# Altium PCB RS485转CAN-V1.PcbDoc
Units mm, origin at the board's own origin, x right, y up, seen from the top; angles counter-clockwise.
Board outline 47.8 x 78.8 mm, 2 copper layers (Top Layer, Bottom Layer), stack 1.571 mm thick; 59 components, 52 nets, 200 pads, 155 vias.
Unrouted connection lines stored in the file: 1.
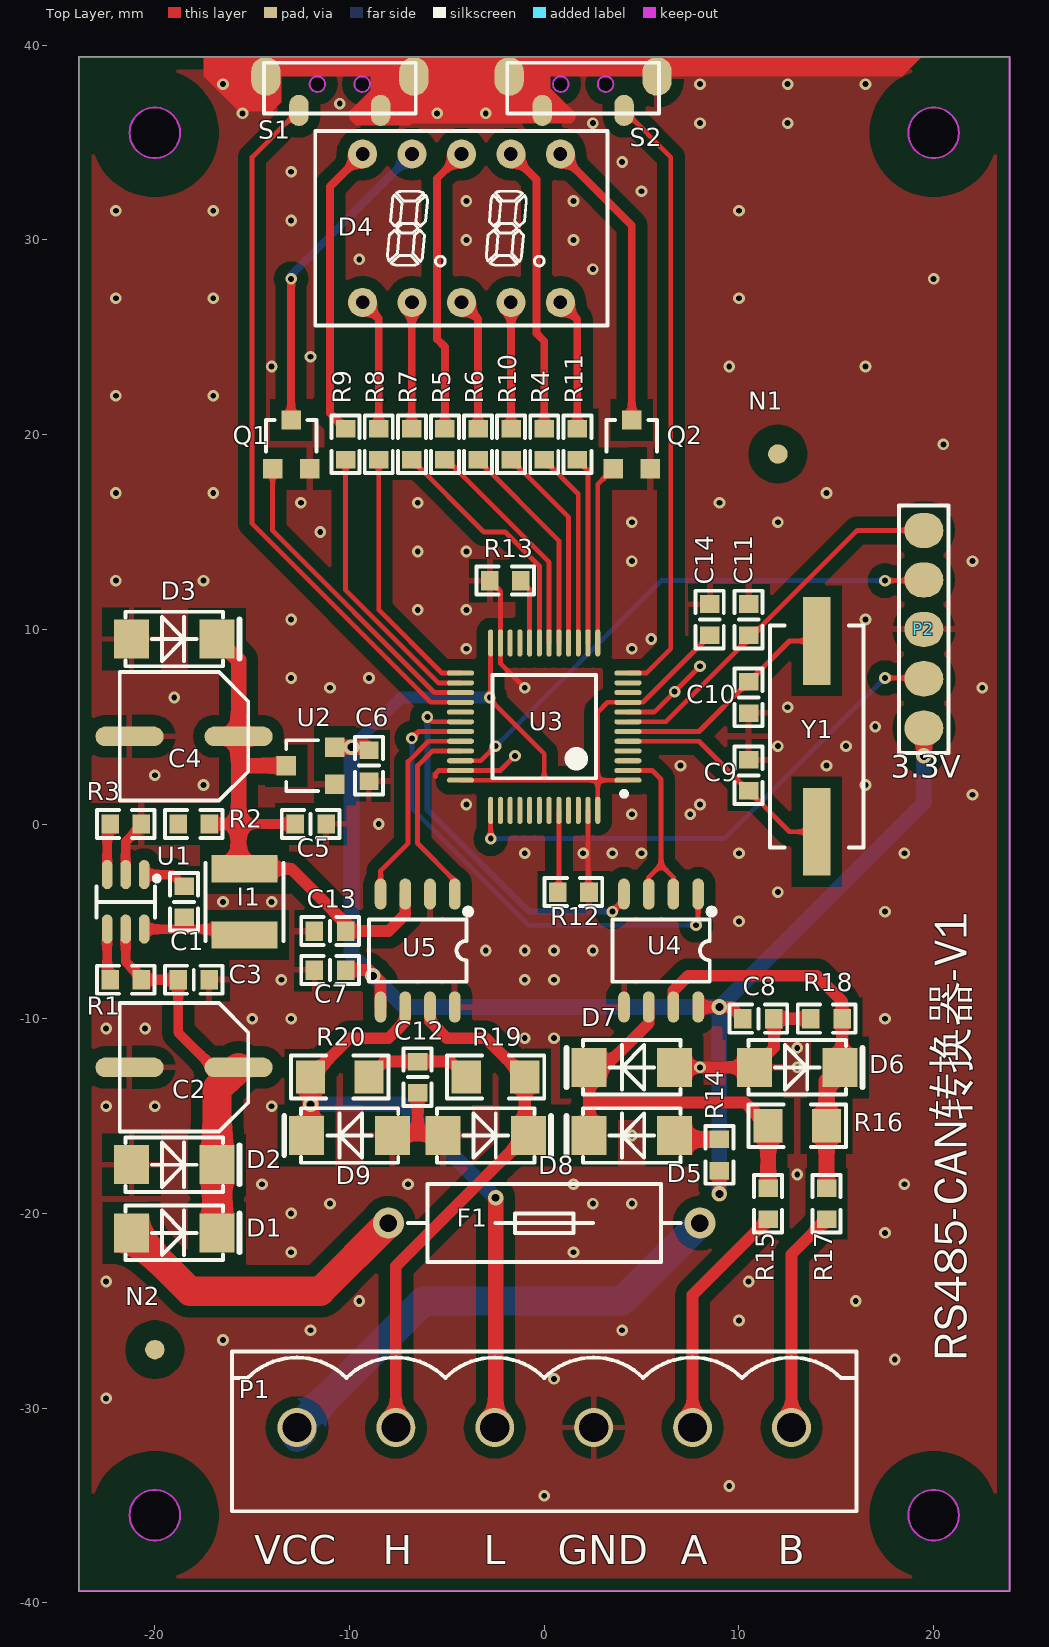
[diagram p0: Top Layer view]
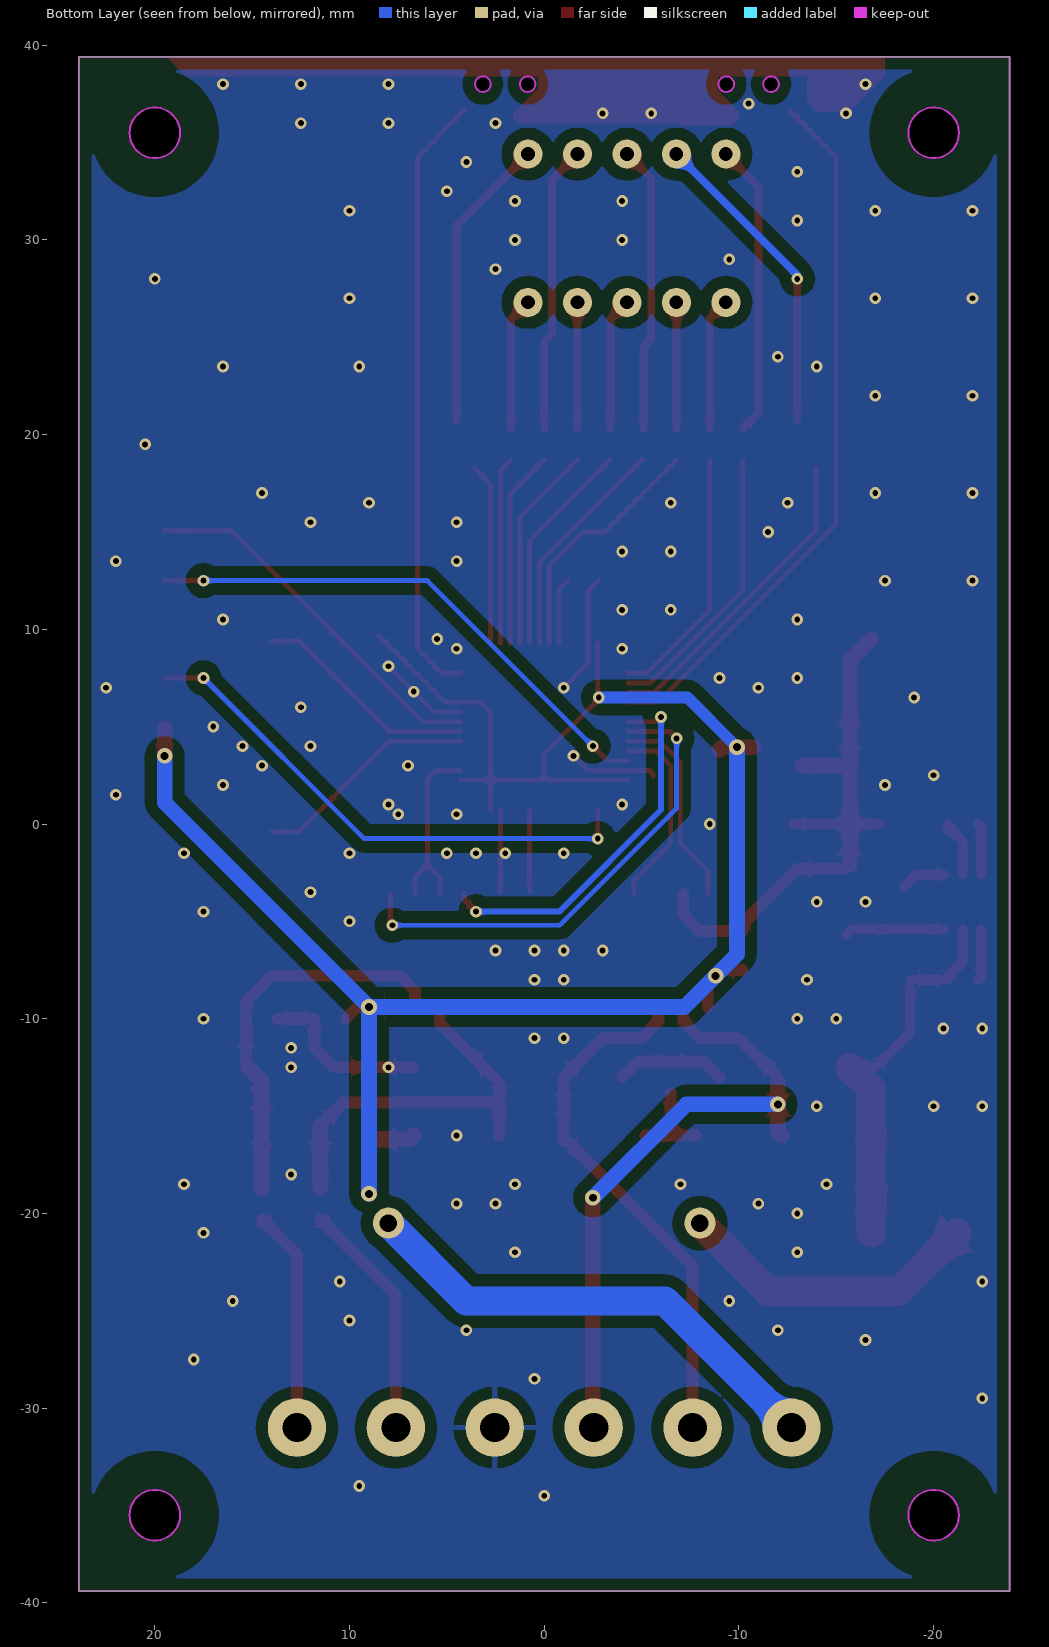
[diagram p1: Bottom Layer view, seen from below]
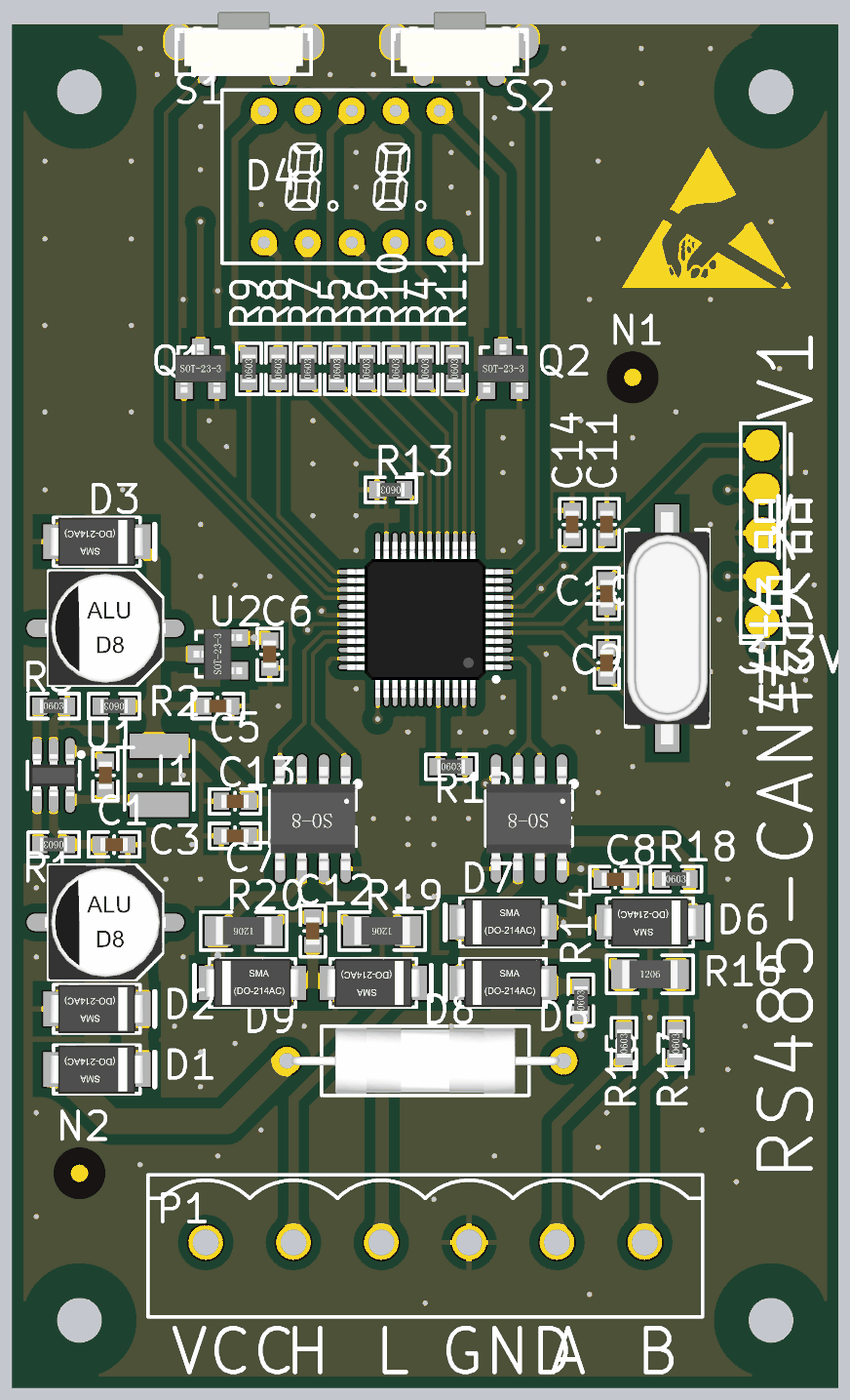
[diagram p2: 3D render of the assembled board from above, using the file's embedded part models]

## Layer stack, top to bottom
Top Solder: solder mask 0.0102, Solder Resist, Dk 3.5
Top Layer: signal copper 0.0356
Dielectric1: dielectric 1.5, FR-4, Dk 4.8
Bottom Layer: signal copper 0.0356
Bottom Solder: solder mask 0.0102, Solder Resist, Dk 3.5

## Board outline
-23.9,-39.4 -23.9,39.4 23.9,39.4 23.9,-39.4
cut-out: -20,-36.8 cw(c-20,-35.5) -21.3,-35.5 cw(c-20,-35.5) -20,-34.2 cw(c-20,-35.5) -18.7,-35.5 cw(c-20,-35.5)
cut-out: 20,-36.8 cw(c20,-35.5) 18.7,-35.5 cw(c20,-35.5) 20,-34.2 cw(c20,-35.5) 21.3,-35.5 cw(c20,-35.5)
cut-out: -20,34.2 cw(c-20,35.5) -21.3,35.5 cw(c-20,35.5) -20,36.8 cw(c-20,35.5) -18.7,35.5 cw(c-20,35.5)
cut-out: 20,34.2 cw(c20,35.5) 18.7,35.5 cw(c20,35.5) 20,36.8 cw(c20,35.5) 21.3,35.5 cw(c20,35.5)

## Design rules (kind name [scope] priority, off if disabled: settings)
Clearance Clearance敷铜间隔 [InPolygon] p1: gap=0.6
Clearance Clearance通用间隔 [All] p2: gap=0.24
PlaneConnect [All] p1: planeconnectstyle=Relief reliefexpansion=0.508 reliefentries=4 reliefconductorwidth=0.3 reliefairgap=0.3
PolygonConnect PolygonConnect_过孔 [All vs IsVia] p1: connectstyle=Direct reliefconductorwidth=0.254 reliefentries=4 polygonreliefangle="90 Angle" airgapwidth=0.254
PolygonConnect [All] p2: connectstyle=Relief reliefconductorwidth=0.3 reliefentries=4 polygonreliefangle="90 Angle" airgapwidth=0.6
RoutingVias [All] p1: holewidth=0.5 width=1 viastyle="Through Hole" minholewidth=0.4 minwidth=0.8 maxholewidth=10 maxwidth=10
SolderMaskExpansion [All] p1: expansion=0.102
Width [All] p1: maxlimit=10 minlimit=0.25 preferedwidth=0.5
29 further rules are at their usual default settings.

## Components (designator, comment, footprint, x,y, rotation, side; value= is the part's Value field where it differs from the comment)
C1 "104" C-0603 -18.5,-4 r90 top
C2 "100UF/35V" 贴片固态电容6.3*7.7 -18.5,-12.5 r180 top
C3 "104" C-0603 -18,-8 r180 top
C4 "470UF/10V" 贴片固态电容6.3*7.7 -18.5,4.5 r180 top
C5 "104" C-0603 -12,0 r180 top
C6 "106" C-0603 -9,3 r90 top
C7 "104" C-0603 -11,-7.5 r0 top
C8 "104" C-0603 11,-10 r180 top
C9 "20P" C-0603 10.5,2.5 r270 top
C10 "20P" C-0603 10.5,6.5 r90 top
C11 "104" C-0603 10.5,10.5 r270 top
C12 "472" C-0603 -6.5,-13 r90 top
C13 "104" C-0603 -11,-5.5 r0 top
C14 "104" C-0603 8.5,10.5 r270 top
D1 "M7" SMA -19,-21 r180 top
D2 "SMAJ30A" SMA -19,-17.5 r180 top
D3 "SMAJ5.0A" SMA -19,9.5 r180 top
D4 "0.28英寸2位共阴绿色" 2位0.28英寸 -4.25,30.6 r0 top
D5 "SS12" SMA 4.5,-16 r0 top
D6 "SMAJ5.0A" SMA 13,-12.5 r180 top
D7 "SMAJ5.0A" SMA 4.5,-12.5 r0 top
D8 "SMAJ5.0A" SMA -3,-16 r180 top
D9 "SMAJ5.0A" SMA -10,-16 r0 top
F1 "F0.25A" FUSE-3*10带引线 0,-20.5 r180 top
I1 "10uH" 4030 -15.4,-4 r90 top
N1 "光学定位点" MARK-1mm-3mm 12,19 r0 top
N2 "光学定位点" MARK-1mm-3mm -20,-27 r0 top
P1 "" KF2EDGVC-5.08-6P 0,-31 r0 top
P2 "ST-LINK" 5P下载口 19.5,10 r90 top
Q1 "2N7002" SOT-23 -13,19.5 r270 top
Q2 "2N7002" SOT-23 4.5,19.5 r270 top
R1 "100K" R-0603 -21.5,-8 r180 top
R2 "11K" R-0603 -18,0 r180 top
R3 "2.1K" R-0603 -21.5,0 r0 top
R4 "470" R-0603 0,19.5 r90 top
R5 "470" R-0603 -5.1,19.5 r90 top
R6 "470" R-0603 -3.4,19.5 r90 top
R7 "470" R-0603 -6.8,19.5 r90 top
R8 "470" R-0603 -8.5,19.5 r90 top
R9 "470" R-0603 -10.2,19.5 r90 top
R10 "470" R-0603 -1.7,19.5 r90 top
R11 "470" R-0603 1.7,19.5 r90 top
R12 "10K" R-0603 1.5,-3.5 r0 top
R13 "10K" R-0603 -2,12.5 r180 top
R14 "1K" R-0603 9,-17 r90 top
R15 "10" R-0603 11.5,-19.5 r90 top
R16 "1K" R-1206 13,-15.5 r0 top
R17 "10" R-0603 14.5,-19.5 r90 top
R18 "1K" R-0603 14.5,-10 r0 top
R19 "62" R-1206 -2.5,-13 r180 top
R20 "62" R-1206 -10.5,-13 r180 top
S1 "地址+/连续+" SB-3*6*3.5 -10.5,38 r180 top
S2 "地址-/设置/确定" SB-3*6*3.5 2,38 r180 top
U1 "BL9341" SOT-23-6-m -21.5,-4 r90 top
U2 "ME6206A33M3G" SOT-23 -12,3 r0 top
U3 "GD32F103C8T6" LQFP48-L 0,5 r90 top
U4 "TP8485E-SR" SOP-8-m 6,-6.5 r180 top
U5 "TJA1051T/3" SOP-8-M -6.5,-6.5 r180 top
Y1 "8M" HC-49SMD 14,4.5 r270 top

## Footprints (in the part's own frame and the unit in brackets; to place one, negate y for a bottom-side part, rotate by r counter-clockwise, add the part's x,y. Pads: shape width x height; smd on the part's side, far side on the other; paste and mask are expansions set on the pad)
2位0.28英寸 [mm]
  round 1.5 hole 0.7: 1(-5.08,-3.81) 2(-2.54,-3.81) 3(0,-3.81) 4(2.54,-3.81) 5(5.08,-3.81) 6(5.08,3.81) 7(2.54,3.81) 8(0,3.81) 9(-2.54,3.81) 10(-5.08,3.81)
  silkscreen extent -7.51,-5 7.51,5, body extent -7.51,-5 7.51,5, height 6.1
5P下载口 [mm]
  oval 1.8x2 smd paste-1: 1(-5.08,0) 2(-2.54,0) 3(0,0) 4(2.54,0) 5(5.08,0)
  silkscreen extent -6.35,-1.27 6.35,1.27
4030 [mm]
  rect 1.4x3.4 smd: 1(-1.7,0) 2(1.7,0)
  silkscreen extent -2,-2 2,2, body extent -2,-2 2,2, height 3
C-0603 [mm]
  rect 0.9x1 smd: 1(-0.8,0) 2(0.8,0)
  silkscreen extent -1.48,-0.72 1.48,0.72, body extent -0.8,-0.4 0.8,0.4, height 0.6
FUSE-3*10带引线 [mm]
  round 1.6 hole 0.9: 1(-8,0) 2(8,0)
  silkscreen extent -7,-2 7,2, body extent -7.75,-1.9 7.75,1.9, height 4.1
HC-49SMD [mm]
  rect 4.5x1.4 smd: 1(-4.9,0) 2(4.9,0)
  silkscreen extent -5.7,-2.4 5.7,2.4, body extent -6.7,-2.46 6.7,2.44, height 4
KF2EDGVC-5.08-6P [mm]
  round 2 / inner round 3 / far side round 3 hole 1.5: 1(-12.7,0) 2(-7.62,0) 3(-2.54,0) 4(2.54,0) 5(7.62,0) 6(12.7,0)
  silkscreen extent -16.04,-4.3 16.04,3.9
LQFP48-L [mm]
  oval 0.26x1.4 smd: 1(-2.75,-4.3) 2(-2.25,-4.3) 3(-1.75,-4.3) 4(-1.25,-4.3) 5(-0.75,-4.3) 6(-0.25,-4.3) 7(0.25,-4.3) 8(0.75,-4.3) 9(1.25,-4.3) 10(1.75,-4.3) 11(2.25,-4.3) 12(2.75,-4.3) 25(2.75,4.3) 26(2.25,4.3) 27(1.75,4.3) 28(1.25,4.3) 29(0.75,4.3) 30(0.25,4.3) 31(-0.25,4.3) 32(-0.75,4.3) 33(-1.25,4.3) 34(-1.75,4.3) 35(-2.25,4.3) 36(-2.75,4.3)
  oval 1.4x0.26 smd: 13(4.3,-2.75) 14(4.3,-2.25) 15(4.3,-1.75) 16(4.3,-1.25) 17(4.3,-0.75) 18(4.3,-0.25) 19(4.3,0.25) 20(4.3,0.75) 21(4.3,1.25) 22(4.3,1.75) 23(4.3,2.25) 24(4.3,2.75) 37(-4.3,2.75) 38(-4.3,2.25) 39(-4.3,1.75) 40(-4.3,1.25) 41(-4.3,0.75) 42(-4.3,0.25) 43(-4.3,-0.25) 44(-4.3,-0.75) 45(-4.3,-1.25) 46(-4.3,-1.75) 47(-4.3,-2.25) 48(-4.3,-2.75)
  silkscreen extent -3.57,-4.23 2.65,2.65, body extent -4.5,-4.5 4.5,4.5, height 1.5
MARK-1mm-3mm [mm]
  round 1 smd paste-0.6 mask+1: 1(0,0)
  Top Layer pour cut-out: -1.5,0 -1.386,-0.574 -1.061,-1.061 -0.574,-1.386 0,-1.5 0,-1.5 0.574,-1.386 1.061,-1.061 1.386,-0.574 1.5,0 1.5,0 1.386,0.574 1.061,1.061 0.574,1.386 0,1.5 0,1.5 -0.574,1.386 -1.061,1.061 -1.386,0.574 -1.5,0
R-0603 [mm]
  rect 0.9x1 smd: 1(-0.8,0) 2(0.8,0)
  silkscreen extent -1.48,-0.72 1.48,0.72, body extent -0.8,-0.4 0.8,0.4, height 0.45
R-1206 [mm]
  rect 1.5x1.7 smd: 1(-1.5,0) 2(1.5,0)
  silkscreen extent -2.5,-1.1 2.5,1.1, body extent -1.6,-0.8 1.6,0.8, height 0.6
SB-3*6*3.5 [mm]
  oval 1x1.6 smd: 1(-2.1,1.35) 2(2.1,1.35)
  oval 1.5x2 smd: 3(-3.8,-0.4) 3(3.8,-0.4)
  Keep-Out Layer circle w0.1: c-1.15,0 r0.4
  Keep-Out Layer circle w0.1: c1.15,0 r0.4
  Keep-Out Layer board cut-out: -1.15,-0.4 -1.303,-0.37 -1.433,-0.283 -1.52,-0.153 -1.55,0 -1.55,0 -1.52,0.153 -1.433,0.283 -1.303,0.37 -1.15,0.4 -1.15,0.4 -0.997,0.37 -0.867,0.283 -0.78,0.153 -0.75,0 -0.75,0 -0.78,-0.153 -0.867,-0.283 -0.997,-0.37 -1.15,-0.4
  Keep-Out Layer board cut-out: 1.15,-0.4 0.997,-0.37 0.867,-0.283 0.78,-0.153 0.75,0 0.75,0 0.78,0.153 0.867,0.283 0.997,0.37 1.15,0.4 1.15,0.4 1.303,0.37 1.433,0.283 1.52,0.153 1.55,0 1.55,0 1.52,-0.153 1.433,-0.283 1.303,-0.37 1.15,-0.4
  silkscreen extent -3.9,-1.1 3.9,1.5, body extent -3.9,-2.1 3.9,1.5, height 3.5
SMA [mm]
  rect 1.8x2 smd: 1(2.2,0) 2(-2.2,0)
  silkscreen extent -3.35,-1.4 2.5,1.4, body extent -2.75,-1.4 2.75,1.4, height 2.6
SOP-8-m [mm]
  oval 0.6x1.6 smd: 1(-1.905,-2.9) 2(-0.635,-2.9) 3(0.635,-2.9) 4(1.905,-2.9) 5(1.905,2.9) 6(0.635,2.9) 7(-0.635,2.9) 8(-1.905,2.9)
  silkscreen extent -2.89,-2.3 2.5,1.6, body extent -2.45,-3 2.45,3, height 1.7
SOP-8-M [mm]
  oval 0.6x1.6 smd: 1(-1.905,-2.9) 2(-0.635,-2.9) 3(0.635,-2.9) 4(1.905,-2.9) 5(1.905,2.9) 6(0.635,2.9) 7(-0.635,2.9) 8(-1.905,2.9)
  silkscreen extent -2.89,-2.3 2.5,1.6, body extent -2.45,-3 2.45,3, height 1.7
SOT-23 [mm]
  rect 1x1 smd: 1(1.25,-0.95) 2(1.25,0.95) 3(-1.25,0)
  silkscreen extent -1.25,-1.3 0.38,1.3, body extent -1.4,-1.45 1.4,1.45, height 1.2
SOT-23-6-m [mm]
  oval 1.5x0.55 smd: 1(1.4,-0.95) 2(1.4,0) 3(1.4,0.95) 4(-1.4,0.95) 5(-1.4,0) 6(-1.4,-0.95)
  silkscreen extent -0.8,-1.7 1.3,1.5, body extent -1.21,-1.4 1.21,1.4, height 1.08
贴片固态电容6.3*7.7 [mm]
  oval 3.5x1 smd: 1(-2.8,0) 2(2.8,0)
  silkscreen extent -3.3,-3.3 3.3,3.3, body extent -3.5,-3.3 3.5,3.3, height 7.71

## Part data
C1 C3 C5 C6 C7 C8 C13 C14: library part Cap, "Capacitor"
C2 C4: library part "Cap Pol1", "Polarized Capacitor (Radial)"
C9 C10 C11 C12: library part Cap-0603, "0805"
D1: "SMA"
D2 D3 D6 D7 D8 D9: library part TVS-1, "SMB"
D4: library part 2位数码管
D5: library part SS14, "SMA"
F1: library part "Fuse 1", "Fuse"
I1: library part Inductance3
N1 N2: library part 无引脚
P1: library part "Header 6", "Header, 6-Pin"
P2: library part ST-LINK-STM32
R1 R2 R3 R4 R5 R6 R7 R8 R9 R10 R11 R12 R13: library part Res2-0603, "0603"
R14 R15 R16 R17 R18 R19 R20: library part Res2, "Resistor"
S1 S2: library part SB-6*6*3.1_1, "SB-6*6*3.1"
U2: "LDO稳压 SOT-23"
U4: library part MAX3082, "RS485总线转串口"
Y1: library part 晶振

## Via types
v1: diameter 0.6, hole 0.3, Top Layer to Bottom Layer, tented both sides, 148 vias
v2: diameter 0.8, hole 0.4, Top Layer to Bottom Layer, tented both sides, 7 vias

## Nets (pads, with @x,y where several pads share a name; then routed paths per layer and width w, separated by ;. In a path a pad name is that pad's centre, name@x,y a point inside that pad or via, vN(x,y) a via of type N, cw(c..) or ccw(c..) an arc to the next point about the centre after c; other vN are vias at no path point)
3.3V: C6.2 C7.2 C8.2 C14.2 P2.1 R14.1 U2.2 U3.1 U3.9 U3.24 U3.36 U3.48 U4.8 U5.5 | length 105.2
  Top Layer w0.25: U3.36 0,2.25 ; U3.24 -2.75,6.35 0,3.6 0,2.25 ; U3.48 2.75,2.25 ; U3.1 2.75,2.25 ; C14.2 8.5,9.68 5.075,6.255 4.305,6.255 U3.9 3.25,6.25 2.75,5.75 2.75,2.25 ; 0,2.25 2.75,2.25
  Top Layer w0.6: C7.2 -9,-7.5 -8.405,-8.095 U5.5 ; U4.8 v2(9,-9.4) 9.6,-9.4 C8.2 ; v2(9,-19) R14.1
  Top Layer w0.8: U2.2 v2(-9.9,3.95) -9.15,3.95 C6.2 ; v2(19.5,3.5) P2.1
  Bottom Layer w0.6: v2(-9.9,3.95) -7.35,6.5 v1(-2.8,6.5)
  Bottom Layer w0.8: v2(-9.9,3.95) -9.9,-6.7 -7.2,-9.4 v2(9,-9.4) ; v2(9,-19) v2(9,-9.4) ; v2(19.5,3.5) 19.5,1.1 v2(9,-9.4)
  other v2: -8.8,-7.8
5V: C4.1 C5.2 C13.2 D3.2 I1.2 R2.1 U2.3 U5.3 | length 30.1
  Top Layer w0.5: R2.1 -15.7,0 C5.2
  Top Layer w0.6: I1.2@-15.5,-2.3 -13,-2.3 -10.2,-5.1 C13.2 -8,-5.5 -7.135,-4.635 U5.3
  Top Layer w0.8: D3.2 -15.7,8.4 C4.1 -15.7,0 I1.2@-15.7,-2.1 ; -15.6,3 U2.3
24V: F1.1 P1.1 | length 25.4
  Bottom Layer w1.5: P1.1@-12.7,-31.5 P1.1@-12.45,-31.25 ; P1.1 -6.2,-24.5 4,-24.5 F1.1
485-A: P1.5 R15.1 | length 12.8
  Top Layer w0.6: P1.5@7.62,-31.5 7.62,-24.18 R15.1
485-B: P1.6 R17.1 | length 11.9
  Top Layer w0.6: P1.6@12.7,-31.5 12.7,-22.1 R17.1
485-RE/DE: U3.2 U4.2 U4.3 | length 9.8
  Top Layer w0.25: U3.2 5.55,2.75 6,2.3 6,-2.1 ; U4.3 5.365,-2.735 6,-2.1 ; U4.2 6.635,-2.735 6,-2.1
485-RXD: U3.31 U4.1 | length 25
  Top Layer w0.25: v1(-6.8,4.4) -6.45,4.75 U3.31 ; v1(7.8,-5.2) 7.905,-5.095 U4.1
  Bottom Layer w0.25: v1(-6.8,4.4) -6.8,0.8 -0.8,-5.2 v1(7.8,-5.2)
485-TXD: U3.30 U4.4 | length 19.4
  Top Layer w0.25: v1(-6,5.5) -5.75,5.25 U3.30
  Top Layer w0.3: v1(3.5,-4.5) 4.095,-3.905 U4.4
  Bottom Layer w0.3: v1(-6,5.5) -6,0.728 -0.772,-4.5 v1(3.5,-4.5)
A: R4.1 U3.15 | length 10.1
  Top Layer w0.25: R4.1 1.75,16.95 U3.15
B: R5.1 U3.18 | length 11.7
  Top Layer w0.25: R5.1 -5.007,18.7 0.25,13.443 U3.18
C: R6.1 U3.17 | length 11.1
  Top Layer w0.25: R6.1 0.75,14.55 U3.17
CAN-H: D8.2 P1.2 R19.1 U5.7 | length 28.1
  Top Layer w0.6: P1.2@-7.62,-31.5 -7.62,-22.72 -1.2,-16.3 -1,-16.3 R19.1 -3,-11 -5,-11 -5.865,-10.135 U5.7
CAN-L: D9.2 P1.3 R20.2 U5.6 | length 33.4
  Top Layer w0.6: R20.2 -10,-11 -8,-11 -7.135,-10.135 U5.6 ; P1.3@-2.54,-31.5 P1.3@-2.5,-31.46
  Top Layer w0.8: D9.2 -12,-15.8 R20.2@-12,-13.3 ; P1.3@-2.5,-31.46 v2(-2.5,-19.2)
  Bottom Layer w0.8: v2(-12,-14.4) -7.3,-14.4 v2(-2.5,-19.2)
CAN-RXD: U3.32 U5.4 | length 10.5
  Top Layer w0.25: U5.4 -8.405,-2.405 -6.99,-0.99 -6.99,3.203 -5.943,4.25 U3.32
CAN-TXD: U3.33 U5.1 | length 9.9
  Top Layer w0.25: U5.1 -4.595,-2.905 -6.5,-1 -6.5,3 -5.75,3.75 U3.33
D: R7.1 U3.19 | length 12.8
  Top Layer w0.25: R7.1 -3.1,15 -2,15 -0.25,13.25 U3.19
DIG1: Q1.1 U3.27 | length 16.3
  Top Layer w0.25: Q1.1 -13.95,15.064 -5.636,6.75 U3.27
DIG2: Q2.1 U3.13 | length 9.3
  Top Layer w0.25: U3.13 2.75,17.45 Q2.1
DP: R11.1 U3.14 | length 9.6
  Top Layer w0.25: R11.1 2.25,18.15 U3.14
E: R8.1 U3.25 | length 13.2
  Top Layer w0.25: R8.1 -8.5,11 -5.25,7.75 U3.25
F: R9.1 U3.26 | length 14.6
  Top Layer w0.25: R9.1 -10.2,12.007 -5.443,7.25 U3.26
G: R10.1 U3.16 | length 10.6
  Top Layer w0.25: R10.1 1.25,15.75 U3.16
GND: C2.2 C3.1 C4.2 C5.1 C6.1 C7.1 C8.1 C9.1 C10.1 C11.1 C12.1 C13.1 C14.1 D2.1 D3.1 D6.1 D7.1 D8.1 D9.1 P1.4 P2.3 Q1.2 Q2.2 R3.2 R12.2 R13.2 R18.1 S1.1 S1.3 S2.2 S2.3 U1.2 U2.1 U3.8 U3.23 U3.35 U3.47 U4.5 U5.2 U5.8 | length 36.4
  Top Layer w0.25: -5.581,2.441 -5.581,2.594 -5.425,2.75 U3.35 -2.25,2.75 v1(-1.5,3.5) ; R13.2 -2.25,11.95 U3.23 -2.25,8.25 v1(-1,7) ; U3.47 2.255,0.695 2.255,-3.5 R12.2 ; U3.8 5.65,5.75 v1(8,8.1)
  Top Layer w0.5: U1.2 -21.5,-0.928 -20.7,-0.128 R3.2
  Top Layer w0.6: D9.1 -6.5,-16 ; C12.1 -6.5,-16 ; D8.1 -6.5,-16 ; D7.1 D6.1 11.8,-11.5 C8.1 R18.1
  other v1: 0,-34.5 9.5,-34 -22.5,-29.5 0.5,-28.5 18,-27.5 -16.5,-26.5 -12,-26 4,-26 10,-25.5 -9.5,-24.5 16,-24.5 -22.5,-23.5 10.5,-23.5 -13,-22 1.5,-22 17.5,-21 -13,-20 -11,-19.5 2.5,-19.5 4.5,-19.5 -14.5,-18.5 -7,-18.5 1.5,-18.5 18.5,-18.5 13,-18 4.5,-16 -22.5,-14.5 -20,-14.5 -14,-14.5 8,-12.5 13,-12.5 13,-11.5 -1,-11 0.5,-11 -22.5,-10.5 -20.5,-10.5 -15,-10 -13,-10 17.5,-10 -13.5,-8 -1,-8 0.5,-8 -3,-6.5 -1,-6.5 0.5,-6.5 2.5,-6.5 10,-5 17.5,-4.5 -16.5,-4 -14,-4 12,-3.5 -1,-1.5 2,-1.5 3.5,-1.5 5,-1.5 10,-1.5 18.5,-1.5 -8.5,0 4.5,0.5 7.5,0.5 -4,1 8,1 22,1.5 -17.5,2 16.5,2 -20,2.5 7,3 14.5,3 12,4 15.5,4 17,5 12.5,6 -19,6.5 6.7,6.8 -11,7 22.5,7 -13,7.5 -9,7.5 -4,9 4.5,9 5.5,9.5 -13,10.5 16.5,10.5 -6.5,11 -4,11 -22,12.5 -17.5,12.5 4.5,13.5 22,13.5 -6.5,14 -4,14 -11.5,15 4.5,15.5 12,15.5 -12.5,16.5 -6.5,16.5 9,16.5 -22,17 -17,17 14.5,17 20.5,19.5 -22,22 -17,22 -14,23.5 9.5,23.5 16.5,23.5 -12,24 -22,27 -17,27 10,27 20,28 2.5,28.5 -9.5,29 -4,30 1.5,30 -13,31 -22,31.5 -17,31.5 10,31.5 -4,32 1.5,32 5,32.5 -13,33.5 4,34 2.5,36 8,36 12.5,36 -15.5,36.5 -5.5,36.5 -3,36.5 -10.5,37 -16.5,38 8,38 12.5,38 16.5,38
NetC1_1: C1.1 I1.1 U1.6 | length 5.2
  Top Layer w0.5: U1.6 -15.8,-5.4 I1.1@-15.5,-5.7
NetC1_2: C1.2 U1.1 | length 2.3
  Top Layer w0.5: U1.1 -19.1,-2.6 C1.2
NetC2_1: C2.1 C3.2 D1.2 D2.2 R1.1 U1.5 | length 20.3
  Top Layer w0.5: U1.5 -21.5,-7.072 -20.7,-7.872 R1.1 C3.2 -18.8,-10.7 -17,-12.5 C2.1
  Top Layer w1.5: D1.2 D2.2 -16.8,-13.6 C2.1
NetC9_2: C9.2 U3.5 Y1.2 | length 11.6
  Top Layer w0.25: U3.5 7.95,4.25 C9.2 12.6,-0.4 Y1.2
NetC10_2: C10.2 U3.6 Y1.1 | length 11.6
  Top Layer w0.25: U3.6 7.95,4.75 C10.2 12.6,9.4 Y1.1
NetC12_2: C12.2 R19.2 R20.1 | length 5.7
  Top Layer w0.6: R20.1 -8.2,-12.2 C12.2 -4.8,-12.2 R19.2
NetD1_1: D1.1 F1.2 | length 15.9
  Top Layer w1.5: D1.1 -18.2,-24 -11.5,-24 F1.2
NetD4_1: D4.1 R8.2 | length 6.8
  Top Layer w0.4: D4.1 -8.5,25.96 R8.2
NetD4_2: D4.2 R7.2 | length 6.5
  Top Layer w0.4: R7.2 -6.8,26.78 D4.2
NetD4_3: D4.3 R6.2 | length 6.8
  Top Layer w0.4: D4.3 -3.4,25.94 R6.2
NetD4_4: D4.4 R10.2 | length 6.5
  Top Layer w0.4: D4.4 -1.7,26.78 R10.2
NetD4_5: D4.5 R11.2 | length 6.9
  Top Layer w0.4: D4.5 1.7,25.92 R11.2
NetD4_6: D4.6 Q2.3 | length 15.2
  Top Layer w0.4: D4.6 4.5,30.74 Q2.3
NetD4_7: D4.7 R4.2 | length 14.8
  Top Layer w0.4: D4.7 -0.4,33.1 -0.4,25.2 0,24.8 R4.2
NetD4_8: D4.8 R5.2 | length 14.8
  Top Layer w0.4: R5.2 -5.1,24.5 -5.5,24.9 -5.5,33.16 D4.8
NetD4_9: D4.9 Q1.3 | length 16.2
  Top Layer w0.4: Q1.3 v1(-13,28)
  Bottom Layer w0.4: v1(-13,28) -13,28.2 D4.9
NetD4_10: D4.10 R9.2 | length 15.1
  Top Layer w0.4: R9.2 -11,21.1 -11,32.74 D4.10
NetD5_1: D5.1 R14.2 | length 2.4
  Top Layer w0.8: D5.1 6.9,-16.2 R14.2
NetD5_2: D5.2 D7.2 R15.2 R16.1 U4.6 | length 20.8
  Top Layer w0.6: D5.2 2.3,-14.4 ; U4.6 5.365,-10.235 2.3,-13.3 2.3,-14.4 ; R16.1 10.3,-14.3 2.4,-14.3 2.3,-14.4
  Top Layer w0.8: R15.2 R16.1
NetD6_2: D6.2 R16.2 R17.2 R18.2 U4.7 | length 20.3
  Top Layer w0.6: U4.7 6.635,-8.565 7.4,-7.8 14,-7.8 15.3,-9.1 R18.2 15.3,-12.4 D6.2
  Top Layer w0.8: R17.2 14.5,-13.2 D6.2
NetR1_2: R1.2 U1.4 | length 2.7
  Top Layer w0.5: U1.4 -22.45,-7.85 R1.2
NetR2_2: R2.2 R3.1 U1.3 | length 2.7
  Top Layer w0.5: U1.3 -22.45,-0.15 R3.1
NetR12_1: R12.1 U3.44 | length 4.2
  Top Layer w0.25: R12.1 0.75,-3.45 U3.44
NetR13_1: R13.1 U3.20 | length 3.4
  Top Layer w0.25: R13.1 -0.75,12.05 U3.20
NRST: C11.2 P2.5 U3.7 | length 19.3
  Top Layer w0.25: U3.7 6.25,5.25 16.08,15.08 P2.5
SWCLK: P2.2 U3.37 | length 27.1
  Top Layer w0.25: v1(-2.75,-0.75) U3.37 ; v1(17.5,7.5) 19.46,7.5 P2.2
  Bottom Layer w0.25: v1(-2.75,-0.75) 9.25,-0.75 v1(17.5,7.5)
SWDIO: P2.4 U3.34 | length 27.6
  Top Layer w0.25: U3.34 -3.25,3.25 v1(-2.5,4) ; v1(17.5,12.5) 19.46,12.5 P2.4
  Bottom Layer w0.25: v1(-2.5,4) 6,12.5 v1(17.5,12.5)
地址+: S1.2 U3.28 | length 36.7
  Top Layer w0.25: S1.2 -15,34.25 -15,15.421 -5.829,6.25 U3.28
地址-: S2.1 U3.12 | length 31.4
  Top Layer w0.25: S2.1 6.5,34.25 6.5,9 5.25,7.75 U3.12
pads on no net: N1.1 N2.1 U3.3 U3.4 U3.10 U3.11 U3.21 U3.22 U3.29 U3.38 U3.39 U3.40 U3.41 U3.42 U3.43 U3.45 U3.46

## Polygon pours and split planes (outlines as drawn)
GND on Top Layer "Bottom Layer-No Net" (solid, remove dead copper, pour order 0): -23.9,-39.4 23.9,-39.4 23.9,39.4 -23.9,39.4
GND on Bottom Layer "Bottom Layer-No Net" (solid, remove dead copper, pour order 2): -23.9,-39.4 23.9,-39.4 23.9,39.4 -23.9,39.4

## Keep-outs
Keep-Out Layer:
  circle w0.1: c-20,-35.5 r1.3
  circle w0.1: c20,-35.5 r1.3
  circle w0.1: c-20,35.5 r1.3
  circle w0.1: c20,35.5 r1.3
  lines w0.1: -23.9,-39.4 23.9,-39.4 23.9,39.4 -23.9,39.4 -23.9,-39.4

## Other copper
Top Layer:
  region net GND: -17.5,39.4 -16.5,38.4 18.4,38.4 19.4,39.4
  region net GND: -17.5,39.4 -17.5,38.4 -15.7,36.6 -13.968,36.6 -13.5,37.068 -13.5,38.6
  region net GND: -8.9,38.8 -8.9,37.7 -10,36.6 -10,36.2 -9.69,35.89 -6.91,35.89 -6.8,36 1.4,36 1.6,36.2 1.6,36.5 0.3,37.8 0.3,38.5
  pour cut-out: -20,-38.8 cw(c-20,-35.5) -23.3,-35.5 cw(c-20,-35.5) -20,-32.2 cw(c-20,-35.5) -16.7,-35.5 cw(c-20,-35.5)
  pour cut-out: 20,-38.8 cw(c20,-35.5) 16.7,-35.5 cw(c20,-35.5) 20,-32.2 cw(c20,-35.5) 23.3,-35.5 cw(c20,-35.5)
  pour cut-out: -20,32.2 cw(c-20,35.5) -23.3,35.5 cw(c-20,35.5) -20,38.8 cw(c-20,35.5) -16.7,35.5 cw(c-20,35.5)
  pour cut-out: 20,32.2 cw(c20,35.5) 16.7,35.5 cw(c20,35.5) 20,38.8 cw(c20,35.5) 23.3,35.5 cw(c20,35.5)
Bottom Layer:
  pour cut-out: -20,-38.8 cw(c-20,-35.5) -23.3,-35.5 cw(c-20,-35.5) -20,-32.2 cw(c-20,-35.5) -16.7,-35.5 cw(c-20,-35.5)
  pour cut-out: 20,-38.8 cw(c20,-35.5) 16.7,-35.5 cw(c20,-35.5) 20,-32.2 cw(c20,-35.5) 23.3,-35.5 cw(c20,-35.5)
  pour cut-out: -20,32.2 cw(c-20,35.5) -23.3,35.5 cw(c-20,35.5) -20,38.8 cw(c-20,35.5) -16.7,35.5 cw(c-20,35.5)
  pour cut-out: 20,32.2 cw(c20,35.5) 16.7,35.5 cw(c20,35.5) 20,38.8 cw(c20,35.5) 23.3,35.5 cw(c20,35.5)

## Silkscreen, mask and mechanical layers (free items; w line width, h text height)
Top Overlay:
  text "3.3V" at 17.8,2 h2
  text "RS485-CAN转换器-V1" at 22.3,-27.6 h3 r90
  text "VCC" at -14.9,-38.5 h2.54
  text "H" at -8.3,-38.5 h2.54
  text "L" at -3.1,-38.5 h2.54
  text "GND" at 0.7,-38.5 h2.54
  text "A" at 7,-38.5 h2.54
  text "B" at 12,-38.5 h2.54
Top Solder:
  drawing of 774 lines, arcs and shapes, not listed
Mechanical 15:
  lines w0.2: -45,-179 43,-179 ; -45,-173 43,-173 ; -45,-167 43,-167 ; -45,-161 43,-161 ; -45,-155 43,-155 ; -45,-149 43,-149 ; -45,-143 43,-143 ; -23,-185 -23,-137 -23,-131 ; -45,-137 -45,-185 43,-185 43,-137 ; -45,-137 43,-137 ; -45,-137 -45,-131 43,-131 43,-137
  text "公司" at -44,-136 h5
  text "杭州久天科技有限公司" at -20,-136 h5
  text "工程" at -44,-142 h5
  text "设计" at -44,-148 h5
  text "邵宁鹏" at -20,-148 h5
  text "日期" at -44,-154 h5
  text "板厚" at -44,-160 h5
  text "1.6mm" at -20,-160 h5
  text "阻焊油" at -44,-166 h5
  text "绿色" at -20,-166 h5
  text "丝印" at -44,-172 h5
  text "白色" at -20,-172 h5
  text "板材" at -44,-178 h5
  text "FR-4" at -20,-178 h5
  text "其他" at -44,-184 h5
  text "有铅喷锡，过孔盖油" at -20,-184 h5

## Dimensions
-23.9,-39.4 to 23.9,-39.4 on Mechanical 15
23.9,-39.4 to 23.9,39.4 on Mechanical 15